# Altium PCB imbuelight_move_detection.PcbDoc
Units mm, origin at the board's own origin, x right, y up, seen from the top; angles counter-clockwise.
Board outline 30 x 30 mm, 2 copper layers (Top Layer, Bottom Layer), stack 0.97 mm thick; 22 components, 15 nets, 80 pads, 26 vias.
Unrouted connection lines stored in the file: 14.
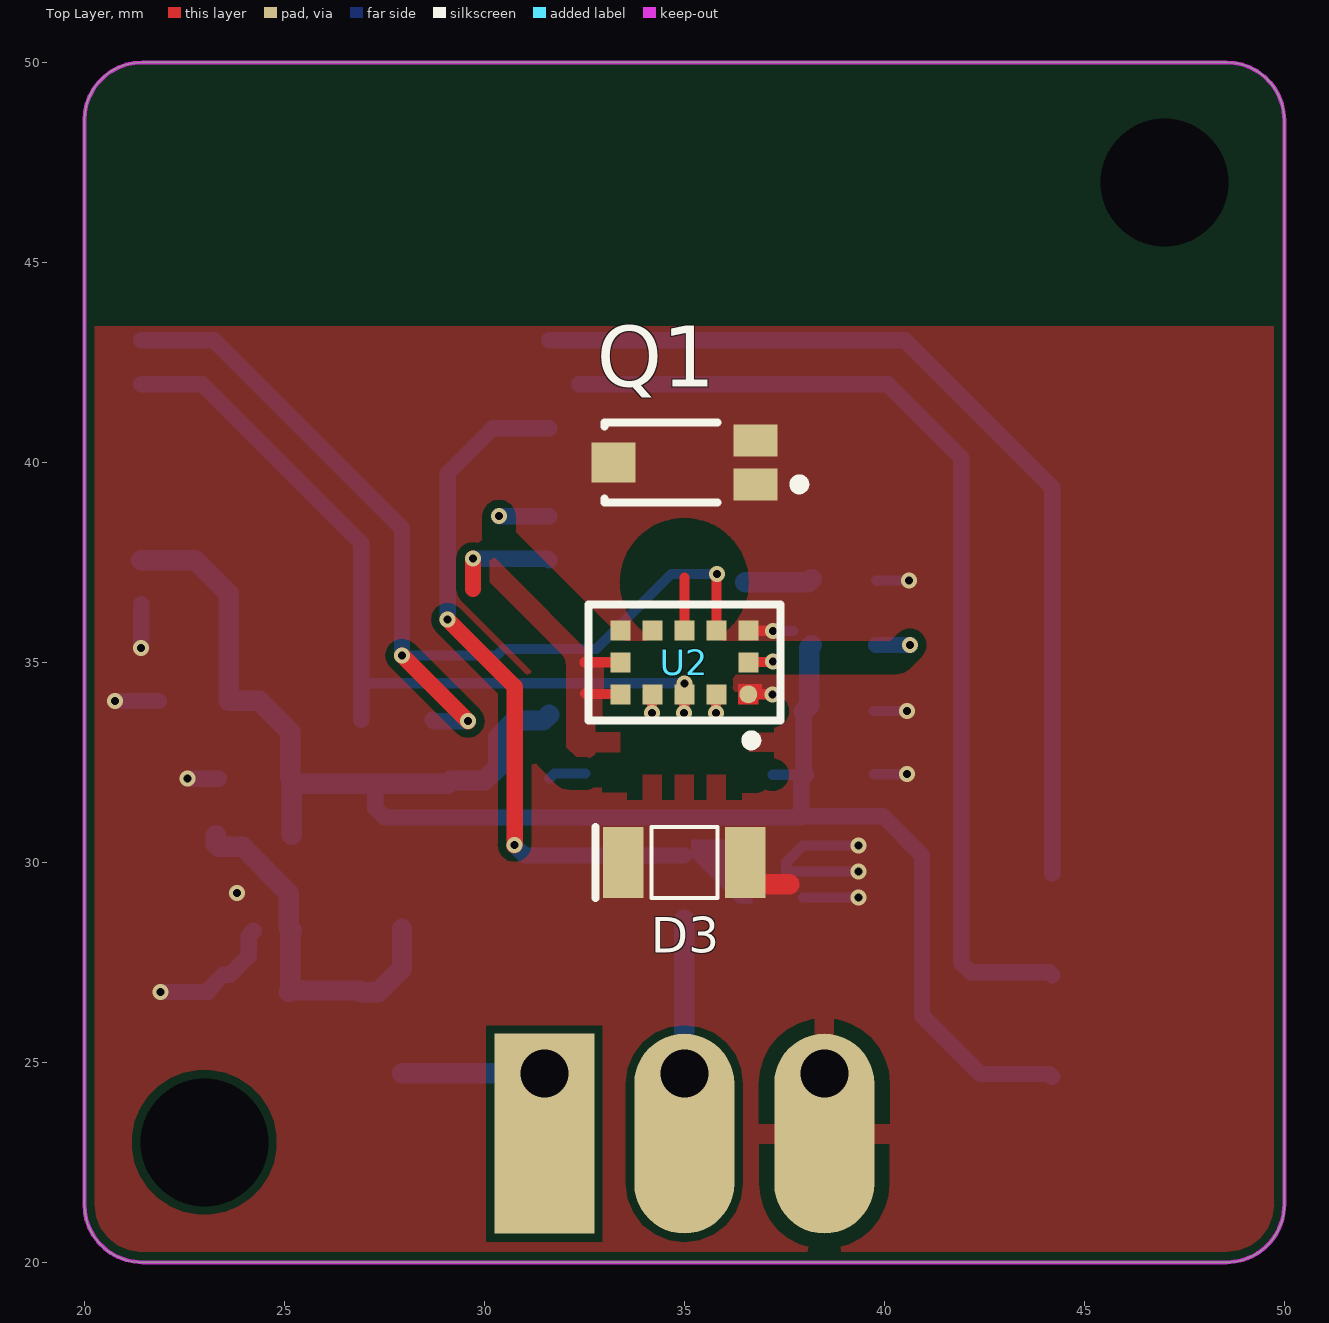
[diagram p0: Top Layer view]
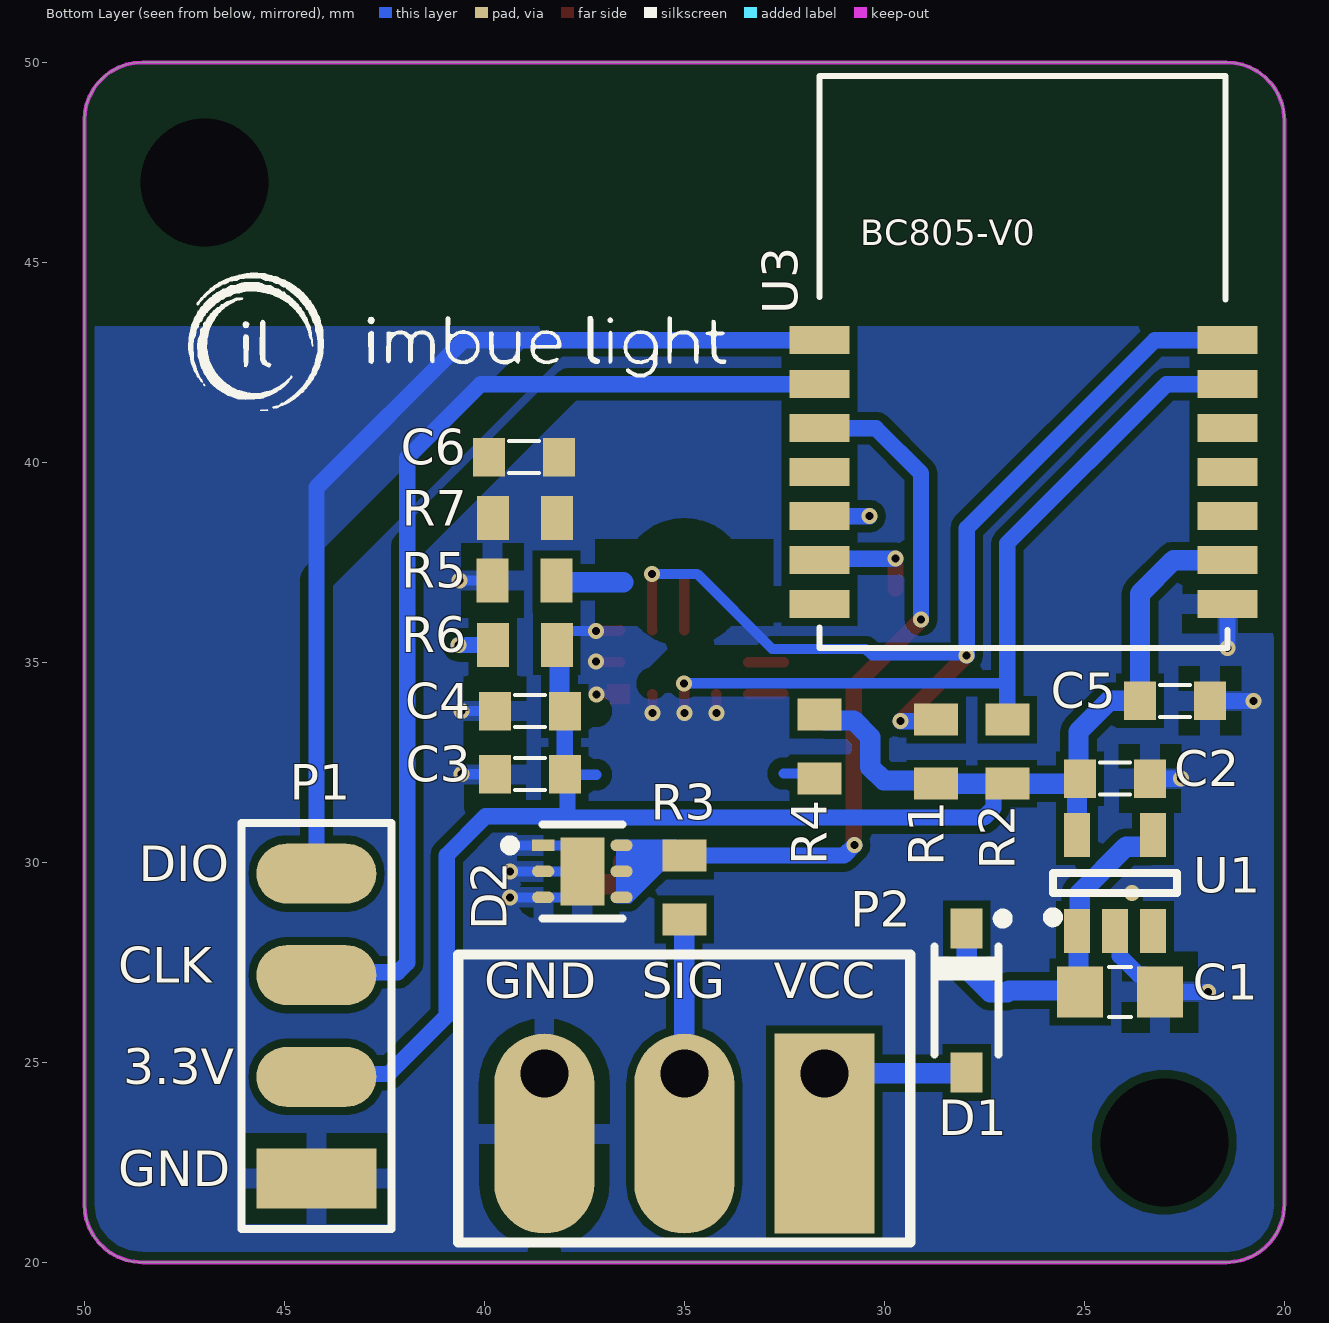
[diagram p1: Bottom Layer view, seen from below]

## Layer stack, top to bottom
Top Solder: solder mask 0.0102, Solder Resist, Dk 3.5
Top Layer: signal copper 0.035
Dielectric 1: dielectric 0.9, FR-4, Dk 4.8
Bottom Layer: signal copper 0.035
Bottom Solder: solder mask 0.0102, Solder Resist, Dk 3.5

## Board outline
20,21.449 ccw(c21.448,21.449) 21.448,20 48.552,20 ccw(c48.552,21.449) 50,21.449 50,48.552 ccw(c48.552,48.552) 48.552,50 21.448,50 ccw(c21.448,48.552) 20,48.552

## Design rules (kind name [scope] priority, off if disabled: settings)
Clearance [All] p1: gap=0.203 ignorepadtopadclearanceinfootprint=FALSE
HoleSize [All] p1: absolutevalues=TRUE maxlimit=7.62 minlimit=0.025 maxpercent=80.000 minpercent=20.000
MinimumSolderMaskSliver [All] p1: minsoldermaskwidth=0.025
PlaneConnect [All] p1: planeconnectstyle=Direct reliefexpansion=0.508 reliefentries=4 reliefconductorwidth=0.254 reliefairgap=0.254
PolygonConnect [All] p1: thpad.connectstyle=Relief thpad.reliefconductorwidth=0.508 thpad.reliefentries=4 thpad.polygonreliefangle="90 Angle" thpad.airgapwidth=0.381 smdpad.connectstyle=Relief smdpad.reliefconductorwidth=0.508 smdpad.reliefentries=4 smdpad.polygonreliefangle="90 Angle" smdpad.airgapwidth=0.381 via.connectstyle=Direct via.reliefconductorwidth=0.508 via.reliefentries=4 via.polygonreliefangle="90 Angle" via.airgapwidth=0.254
RoutingVias [All] p1: holewidth=0.2 width=0.4 viastyle="Through Hole" minholewidth=0.2 minwidth=0.4 maxholewidth=0.5 maxwidth=1
SilkToSilkClearance [All] p1: silktosilkclearance=0
SilkToSolderMaskClearance [IsPad] p1: minsilkscreentomaskgap=0.003 clearancetoexposedcopper=TRUE
SolderMaskExpansion [All] p1: expansion=0.102 istentingtop=FALSE
Width [All] p1: maxlimit=4 minlimit=0.254 preferedwidth=0.254 minimp=50.000000 maximp=50.000000 favimp=50.000000
25 further rules are at their usual default settings.

## Components (designator, comment, footprint, x,y, rotation, side; value= is the part's Value field where it differs from the comment)
C1 "0805 1uF 20V" CAP_SMD_0805 24.108,26.759 r0 bottom
C2 "0603 1uF 10V" CAP_SMD_0603 24.235,32.093 r0 bottom
C3 "0603 1uF 10V" CAP_SMD_0603 38.864,32.204 r180 bottom
C4 "0603 1uF 10V" CAP_SMD_0603 38.862,33.782 r180 bottom
C5 "0603 1uF 10V" CAP_SMD_0603 22.733,34.036 r0 bottom
C6 "0603 1uF 10V" CAP_SMD_0603 39.003,40.132 r180 bottom
D1 "BAT43W-E3-08" SOD-123 27.94,26.543 r270 bottom
D2 "TVS0500DRVR" FP-DRV0006A-IPC_C 37.55,29.774 r180 bottom
D3 "Dioda LED SMD 1206" "LED SMD 1206" 35,30 r90 top locked
P1 "HEADER_1X3_2.54_0DEG_THT" HDR1X4 44.196,22.098 r90 bottom
P2 "15EDGRC-3.5-3P" 15EDGVC-3.5-03P-14-00A(H) 35,24.717 r0 bottom locked
Q1 "TEMT6000X01" VSIL-TEMT6000X01_V 35,40 r180 top locked
R1 "0603 10kOhm 1%" RES_0603 28.702,32.766 r90 bottom
R2 "0603 10kOhm 1%" RES_0603 26.924,32.766 r90 bottom
R3 "0603 10Ohm 1%" RES_0603 35,29.37 r90 bottom
R4 "0603 10kOhm 1%" RES_0603 31.623,32.893 r90 bottom
R5 "0603 1kOhm 1%" RES_0603 38.994,37.044 r180 bottom
R6 "0603 10kOhm 1%" RES_0603 38.989,35.433 r0 bottom
R7 "0603 10kOhm 1%" RES_0603 38.989,38.608 r0 bottom
U1 "MCP1804T-3302I/OT" SOT-23-5 24.235,29.483 r90 bottom
U2 "VL53L0CXV0DH/1" FP-LGA-12-MFG 35,35 r0 top locked
U3 "BC805M" BC805 31.671,35.29 r180 bottom locked

## Footprints (in the part's own frame and the unit in brackets; to place one, negate y for a bottom-side part, rotate by r counter-clockwise, add the part's x,y. Pads: shape width x height; smd on the part's side, far side on the other; paste and mask are expansions set on the pad)
15EDGVC-3.5-03P-14-00A(H) [mm] "Złącze 3 pin - pionowy"
  rect 2.5x5 hole 1.2 copper offset 0,1.5: 1(-3.5,0)
  oval 2.5x5 hole 1.2 copper offset 0,1.5: 2(0,0) 3(3.5,0)
  silkscreen extent -5.65,-2.98 5.65,4.23, body extent -5.65,-2.97 5.65,4.23, height 9.2
BC805 [mm]
  rect 1.5x0.7 smd: 1(0.048,7.763) 2(0.048,6.663) 3(0.048,5.563) 4(0.048,4.463) 5(0.048,3.363) 6(0.048,2.263) 7(0.048,1.163) 8(10.248,1.163) 9(10.248,2.263) 10(10.248,3.363) 11(10.248,4.463) 12(10.248,5.563) 13(10.248,6.663) 14(10.248,7.763)
  silkscreen extent 0.05,0.07 10.25,14.37, body extent 0.05,0.07 10.25,14.37, height 2.2
CAP_SMD_0603 [mm]
  rect 0.8x0.965 smd: 1(-0.875,0) 2(0.875,0)
  silkscreen extent -0.38,-0.4 0.38,0.4, body extent -1.23,-0.4 1.23,0.4, height 0.8
CAP_SMD_0805 [mm]
  rect 1.143x1.27 smd: 1(-1,0) 2(1,0)
  silkscreen extent -0.28,-0.63 0.28,0.63, body extent -1.4,-0.63 1.4,0.63, height 0.8
FP-DRV0006A-IPC_C [mm]
  rect 0.556x0.292 smd paste+0 mask+0: 1(-0.978,0.65)
  rrect100% 0.556x0.292 smd paste+0 mask+0: 2(-0.978,0) 3(-0.978,-0.65) 4(0.978,-0.65) 5(0.978,0) 6(0.978,0.65)
  rect 1.1x1.7 smd paste-1000 mask+0: 7(0,0)
  silkscreen extent -1.93,-1.17 1,1.17, body extent -1,-1 1,1, height 0.8
FP-LGA-12-MFG [mm]
  round 0.45 smd paste+0 mask+0: 1(1.6,-0.8)
  rect 0.5x0.5 smd paste+0 mask+0: 2(0.8,-0.8) 3(0,-0.8) 4(-0.8,-0.8) 5(-1.6,-0.8) 6(-1.6,0) 7(-1.6,0.8) 8(-0.8,0.8) 9(0,0.8) 10(0.8,0.8) 11(1.6,0.8) 12(1.6,0)
  Top Layer region: 1.35,-0.55 1.93,-0.55 1.93,-0.8 1.85,-0.8 1.85,-1.05 1.35,-1.05
  silkscreen extent -2.4,-2.07 2.4,1.45, body extent -2.73,-1.73 2.73,1.73, height 0.25
HDR1X4 [mm] "Connector; Header; 4 Position"
  rect 1.5x3 smd: 1(0,0)
  oval 1.5x3 smd: 2(2.54,0) 3(5.08,0) 4(7.62,0)
  silkscreen extent -1.27,-1.87 8.89,1.88
"LED SMD 1206" [mil] "LED SMD 1206"
  rect 70x40 smd: A(0,-60) K(0,60)
  silkscreen extent -35,-32 35,88, body extent -33,-65 33,65, height 47
RES_0603 [mm] "Chip Resistor 0603"
  rect 0.8x1.1 smd: 1(-0.8,0) 2(0.8,0)
  body extent -0.82,-0.45 0.82,0.45, height 0.55
SOD-123 [mm] "SOD-123 SMD packed"
  rect 1x0.8 smd: A(1.8,0) K(-1.8,0)
  silkscreen extent -2.17,-0.8 1.35,1.02, body extent -1.95,-0.85 1.95,0.85, height 1.45
SOT-23-5 [mm] "SOT23, 5-Leads, Body 2.9x1.6mm, Pitch 0.95mm, Lead Span 2.7mm, IPC Medium Density"
  rect 1.1x0.65 smd: 1(-1.2,0.95) 2(-1.2,0) 3(-1.2,-0.95) 4(1.2,-0.95) 5(1.2,0.95)
  silkscreen extent -0.98,-1.55 0.25,1.68, body extent -1.6,-1.55 1.6,1.55, height 1.45
VSIL-TEMT6000X01_V [mm] "SMD, 3-Leads, Body 4x2mm"
  rect 1.1x0.8 smd: 1(-1.775,0.55) 2(-1.775,-0.55)
  rect 1.1x1 smd: 3(1.775,0)
  silkscreen extent -3,-1 2,1, body extent -2,-1 2,1, height 1.05

## Part data
C1 C2 C3 C4 C5 C6: library part "Capacitor SMD", "Capacitor"
  C1: Wartość=1uF/50V
  C2 C4 C5: Wartość=1uF
  C3 C6: Wartość=100nF
D1: library part "Dioda SMD", "Dioda SMD", Wartość=BAT43W-E3-08
D2: "ESD Suppressors / TVS Diodes 5V flat-clamp surge protection device 6-WSON -40 to 125", Supplier Part Number 1=296-48382-1-ND, Supplier 1=Digi-Key
P1: library part "Header 1x4", "4pin 1x4 2.54mm 0.100\" pitch header vertical tht", Manufacturer Part Number=HEADER_1X3_2.54_0DEG_THT
P2: library part 15EDGVC-3.5-03P-14-00A(H), "15EDGVC-3.5-03P-14-00A(H) - 3 pin", Manufacturer Part Number=15EDGRC-3.5-3P
Q1: library part CMP-1666-00035-1, "Ambient Light Sensor / , 100 mW, -40 to 100 degC, 3-Pin SMD, RoHS, Tape and Reel", Case Code (Imperial)=0603, Case Code (Metric)=1608, Colour=Red, Forward Current="20 mA", Forward Voltage="2 V", Max Operating Temperature="85 degC", Min Operating Temperature="-55 degC", Package Quantity=3000, Power Rating="75 mW", Case\Package=0603, ComponentLink1Description="Manufacturer URL", ComponentLink1URL=http://www.vishay.com/, ComponentLink2Description=Datasheet, ComponentLink2URL=http://www.vishay.com/docs/81579/temt6000.pdf, DatasheetVersion="Rev. 1.9, 08/2011", Height="0.8 mm", Illumination Colour=Red, Length="1.6 mm", Lens Style=Diffused, Luminous Intensity="54 mcd", Mount="Surface Mount", Nominal Vf="2 V", PackageDescription="3-Pin Surface Mount Device, Body 4 x 2 mm", PackageReference=1206, Packaging="Tape and Reel", Pins=2, Radiation Hardening=No, RoHSCompliant=true, Viewing Angle="130 degrees", Width="0.8 mm"
R1 R2 R4 R6 R7: library part "Resistor SMD_1", "Generic Resistor SMD", Resistance=10kOhm, Supplier Part Number 1=C3017715, Manufacturer Part Number="0603 10kOhm 1%", Supplier 1=LCSC
R3: library part "Resistor SMD_1", "Generic Resistor SMD", Resistance=10Ohm, Supplier Part Number 1=C22859, Manufacturer Part Number="0603 10Ohm 1%", Supplier 1=LCSC
R5: library part "Resistor SMD_1", "Generic Resistor SMD", Resistance=1kOhm, Supplier Part Number 1=C3016283, Manufacturer Part Number="0603 1kOhm 1%", Supplier 1=LCSC
U1: "Regulatro LDO 3,3V", Manufacturer=Microchip, Supplier Part Number 1=MCP1804T-3302I/OTTR-ND, Code_IPC=SOT23-5, ComponentLink1Description="Manufacturer URL", ComponentLink1URL=http://www.microchip.com/, ComponentLink2Description=Datasheet, ComponentLink2URL=http://ww1.microchip.com/downloads/en/DeviceDoc/22200b.pdf, ComponentLink3Description="Package Specification", ComponentLink3URL=http://www.microchip.com/stellent/groups/techpub_sg/documents/packagingspec/en012702.pdf, DatasheetVersion="revB, Nov-2009", Mounting Technology="Surface Mount", PackageDescription="5-Lead Plastic Small Outline Transistor (OT) [SOT-23]", PackageReference=SOT-23-OT5, PackageVersion="revBB, Aug-2009", PartNumber=MCP1804T-3302I/OT, Supplier 1=Digi-Key, Supplier 2=Digi-Key, Supplier 3=Digi-Key, Supplier 4=Farnell, Supplier 5=Newark, Supplier 6=Newark, Supplier 7=Mouser, Supplier Part Number 2=MCP1804T-3302I/OTCT-ND, Supplier Part Number 3=MCP1804T-3302I/OTDKR-ND, Supplier Part Number 4=1825006, Supplier Part Number 5=55R1047, Supplier Part Number 6=52R9938, Supplier Part Number 7=579-MCP1804T-3302IOT
U2: "SENSOR OPTICAL 200CM I2C", Manufacturer=STMicroelectronics, Max Supply Voltage=3.5V, Min Supply Voltage=1.6V, Operating Supply Current=0.016-19mA, Package=LGA-12, Temperature="-20°C to +70°C", Temperature Range High=+70°C, Temperature Range Low=-20°C, Automotive=No, Category=IC, ComponentLink2Description=Datasheet, ComponentLink2URL=https://www.st.com/resource/en/datasheet/vl53l0x.pdf, Device Class L1=Sensors, Device Class L2="Optical Sensors", Device Class L3=unset, Digikey Description="SENSOR OPTICAL 200CM I2C", Height=1.05mm, Lead Free=Yes, Manufacturer Part Number=VL53L0CXV0DH/1, Octopart=https://octopart.com/vl53l0cxv0dh%2F1-stmicroelectronics-71168165, RoHS=TRUE, Sensor Output=I2C
U3: "Bluetooth Low Energy (BLE) 5 Module", Supplier Part Number 1=1914-BC805MCT-ND, Supplier 1=Digi-Key
D3: Opis="Dioda LED", Typ obudowy="SMD 1206", Wartość="LED SMD"

## Free pads (board coordinates)
  round 1.524 hole 3.2: 2(23,23) 2(47,47)

## Via types
v1: diameter 0.4, hole 0.2, Top Layer to Bottom Layer, tented both sides, 25 vias
v2: diameter 0.4, hole 0.2, Top Layer to Bottom Layer, 1 vias

## Nets (pads, with @x,y where several pads share a name; then routed paths per layer and width w, separated by ;. In a path a pad name is that pad's centre, name@x,y a point inside that pad or via, vN(x,y) a via of type N, cw(c..) or ccw(c..) an arc to the next point about the centre after c; other vN are vias at no path point)
3V3: C2.2 C3.2 C4.2 C5.2 P1.2 Q1.3 R1.1 R2.1 R4.2 R6.1 U1.5 U2.1 U2.11 U3.9 | length 47
  Top Layer w0.254: U2.1@36.591,34.21 U2.1 37.193,34.2 v1(37.202,34.191) ; U2.11 36.609,35.791 37.202,35.791 v1(37.211,35.782)
  Bottom Layer w0.254: 37.202,32.191 C3.2@37.8,32.191 ; v1(37.211,35.782) 37.733,35.782
  Bottom Layer w0.406: R2.1 27.074,31.966 27.271,31.769 27.271,31.36 27.509,31.121 37.92,31.121 37.92,32.136 C3.2 ; 37.92,31.15 39.97,31.15 40.942,30.178 40.942,26.168 42.404,24.706 44.128,24.706 P1.2 ; C3.2 C4.2
  Bottom Layer w0.508: U3.9 22.772,37.553 23.608,36.717 C5.2 24.377,34.036 25.146,33.267 25.146,32.131 25.185,32.093 C2.2@25.185,32.037 ; U1.5 C2.2@25.185,32.037 ; R4.2 31.477,33.547 30.762,33.547 30.348,33.133 30.348,32.38 30.014,32.046 29.163,32.046 29.083,31.966 R1.1 27.271,31.966 R2.1 25.256,31.966 C2.2@25.185,32.037 ; C4.2 38.12,33.915 38.12,35.364 R6.1
AMBIENT_SIG: C6.2 Q1.1 R7.1 U3.10
GND: C1.1 C2.1 C3.1 C4.1 C5.1 C6.1 D2.1 D2.2 D2.3 D2.7 P1.1 P2.3 R5.1 R7.2 U1.2 U2.2 U2.3 U2.4 U2.6 U2.12 U3.8 | length 17.1
  Top Layer w0.254: 32.51,35 U2.6 ; v1(34.192,33.728) 34.196,33.732 34.196,34.197 U2.4 ; v1(34.992,33.728) 34.996,33.732 34.996,34.197 U2.3 ; v1(35.792,33.728) 35.796,33.732 35.796,34.197 U2.2 ; U2.12 36.61,35.01 37.201,35.01 v1(37.211,35.02)
  Bottom Layer w0.254: D2.7@37.973,29.124 D2.3 v1(39.356,29.124) ; v1(39.356,29.774) D2.2 D2.7 37.55,30.001 37.973,30.424 D2.1 v1(39.356,30.424) ; C4.1 v1(40.565,33.782) ; C3.1 v1(40.567,32.204) ; R5.1 v1(40.622,37.044)
  Bottom Layer w0.406: v1(20.768,34.036) C5.1 ; v1(21.423,35.363) U3.8 ; v1(21.908,26.759) C1.1 23.108,26.822 23.476,27.19 23.642,27.19 24.113,27.661 24.113,28.161 U1.2 U1.2@24.22,28.297 ; v1(22.584,32.093) C2.1
  other v1: 23.813,29.233
I2C_SCL: R1.2 U2.10 U3.14 | length 25
  Top Layer w0.254: U2.10 35.807,35.807 35.807,37.204 v2(35.814,37.211)
  Top Layer w0.406: v1(27.94,35.17) 27.949,35.17 v1(29.591,33.528)
  Bottom Layer w0.254: v1(27.94,35.17) 30.309,35.17 30.473,35.333 32.802,35.333 34.68,37.211 v2(35.814,37.211)
  Bottom Layer w0.406: U3.14 23.241,43.053 27.94,38.354 v1(27.94,35.17) ; R1.2 28.74,33.528 v1(29.591,33.528)
I2C_SDA: R2.2 U2.9 U3.13 | length 21.6
  Top Layer w0.254: U2.9 35.003,35.804 35.003,37.113 35.006,37.116 ; 35.002,33.803 35.002,34.473 v1(35.005,34.475)
  Bottom Layer w0.254: 26.933,34.475 v1(35.005,34.475)
  Bottom Layer w0.406: U3.13 22.944,41.953 26.924,37.973 R2.2
NetD1_A: D1.A P2.1 | length 3.6
  Bottom Layer w0.508: D1.A@27.94,24.727 31.49,24.727 P2.1
NetD3_A: D3.A U3.7 | length 1.1
  Top Layer w0.508: D3.A@36.524,29.707 D3.A ; D3.A@36.778,29.453 37.627,29.453
NetD3_K: D3.K R5.2 | length 1.7
  Bottom Layer w0.508: 36.524,37 38.105,37 R5.2@38.189,37.084
SENS_IO: R6.2 U2.7 U3.5 | length 2.1
  Bottom Layer w0.406: v1(30.368,38.653) U3.5 ; R6.2 v1(40.64,35.433)
SENS_XSHUT: R4.1 U2.5 U3.6 | length 4.5
  Top Layer w0.254: 32.522,34.223 32.534,34.212 33.389,34.212 U2.5
  Top Layer w0.406: 29.718,36.835 v1(29.718,37.592)
  Bottom Layer w0.254: R4.1 31.753,32.223 32.522,32.223
  Bottom Layer w0.406: v1(29.718,37.592) 31.584,37.592 U3.6
SIGNAL: P2.2 R3.1 | length 3.9
  Bottom Layer w0.508: P2.2 R3.1
SIGNAL_MCU: D2.4 D2.5 D2.6 R3.2 U3.3 | length 17.4
  Top Layer w0.406: v1(29.083,36.068) 30.763,34.388 30.763,30.441 v1(30.75,30.429)
  Bottom Layer w0.406: v1(29.083,36.068) 29.083,39.726 30.21,40.853 U3.3 ; v1(30.75,30.429) 31.009,30.17 R3.2
SWD_CLK: P1.3 U3.2 | length 25.3
  Bottom Layer w0.406: 32.373,41.953 40.089,41.953 41.926,40.116 41.926,27.489 42.164,27.251 44.123,27.251 P1.3
SWD_DIO: P1.4 U3.1 | length 23.8
  Bottom Layer w0.406: U3.1 40.513,43.053 44.196,39.37 P1.4
VIN: C1.2 D1.K U1.1 U1.4 | length 9.2
  Bottom Layer w0.508: U1.4 23.285,30.457 23.356,30.386 23.959,30.386 25.113,29.232 25.113,28.367 25.191,28.289 25.146,28.244 C1.2@25.146,26.797 ; C1.2 C1.2@25.146,26.797 ; D1.K 27.94,27.343 27.35,26.753 26.93,26.753 26.886,26.797 C1.2@25.146,26.797
pads on no net: Q1.2 U1.3 U2.8 U3.4 U3.11 U3.12

## Polygon pours and split planes (outlines as drawn)
GND on Bottom Layer "" (solid, pour order 0): 50,50 20,50 20,20 50,20
GND on Top Layer "GND_L01_P001" (solid, pour order 1): 50,50 20,50 20,20 50,20

## Keep-outs
Keep-Out Layer:
  the board outline again, w0.1

## Other copper
Top Layer:
  pour cut-out: 20,43.403 50,43.403 50,50 20,50
Bottom Layer:
  pour cut-out: 20,43.403 50,43.403 50,50 20,50
  region net SIGNAL_MCU: 35.175,30.57 35.175,30.141 36.338,28.978 36.704,28.978 36.704,30.57

## Silkscreen, mask and mechanical layers (free items; w line width, h text height)
Bottom Overlay:
  drawing of 20 lines, arcs and shapes, not listed
  text "Stair move detector / ver 1.0" at 48.479,52.035 h1.5
  text "DIO" at 48.641,29.228 h1.52
  text "CLK" at 49.149,26.687 h1.52
  text "VCC" at 32.766,26.306 h1.52
  text "SIG" at 36.068,26.307 h1.52
  text "GND" at 40.005,26.307 h1.52
  text "3.3V" at 49.022,24.148 h1.52
  text "GND" at 49.149,21.608 h1.52
Mechanical 1:
  lines w0.1: 20,35 50,35 ; 31.5,30 35,30 35,35 ; 35,20 35,50 ; 35,33 35,35 ; 35,37 35,35 ; 38.5,31.5 35,31.5 35,35 ; 38.5,40 35,40 35,35 ; 40.56,35 40.65,35 40.65,20.492 ; 57.023,104.507 87.023,134.507 ; 57.023,104.507 72.023,104.507 87.023,104.507 ; 57.023,104.507 57.023,119.507 57.023,134.507 ; 57.023,134.507 87.023,104.507 ; 57.023,134.507 72.023,134.507 87.023,134.507 ; 87.023,104.507 87.023,119.507 87.023,134.507

## Text inside footprints (layer, text, board x,y; h text height)
U3: Bottom Overlay "BC805-V0" at 30.607,45.426 h0.64